# Altium PCB 25X48MM_NFC_ANTENNA_2025-11-10.pcbdoc
Units mm, origin at the board's own origin, x right, y up, seen from the top; angles counter-clockwise.
Board outline 76.21 x 52.06 mm, 2 copper layers (Top Layer, Bottom Layer); 1 components, 0 nets, 2 pads, 0 vias.
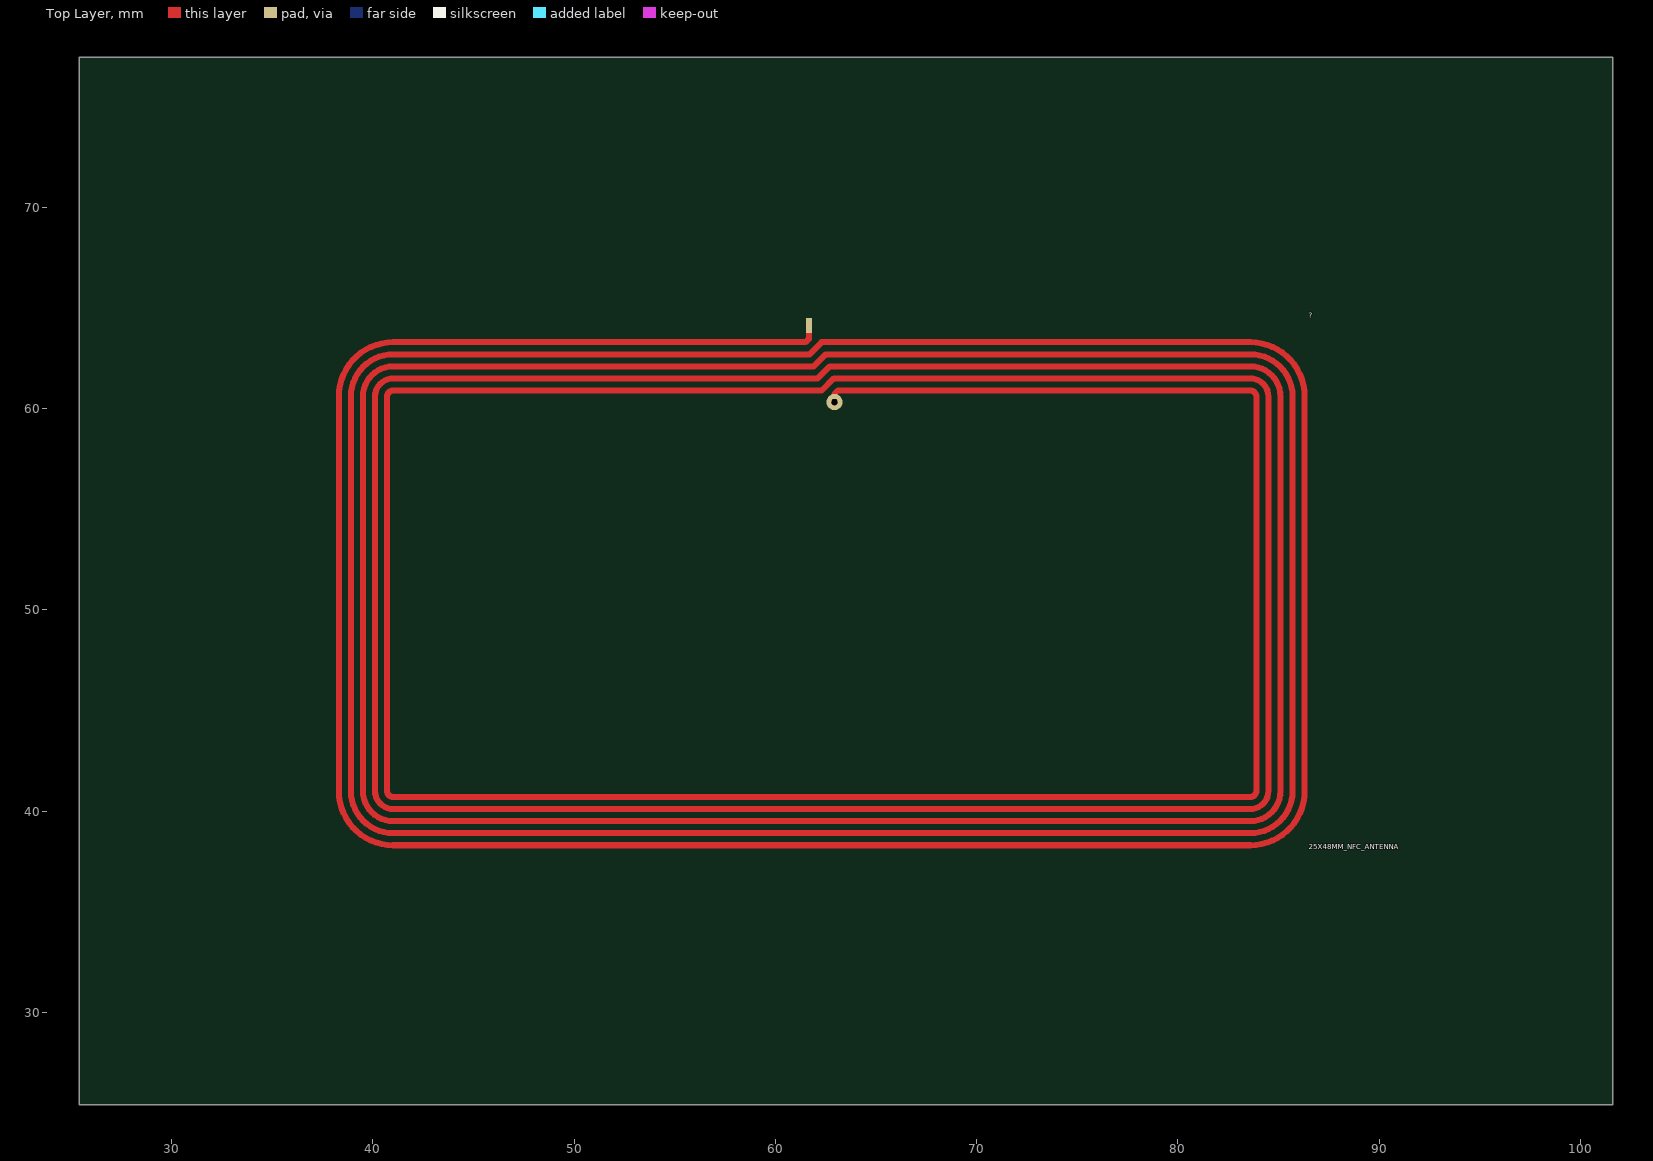
[diagram p0: Top Layer view]
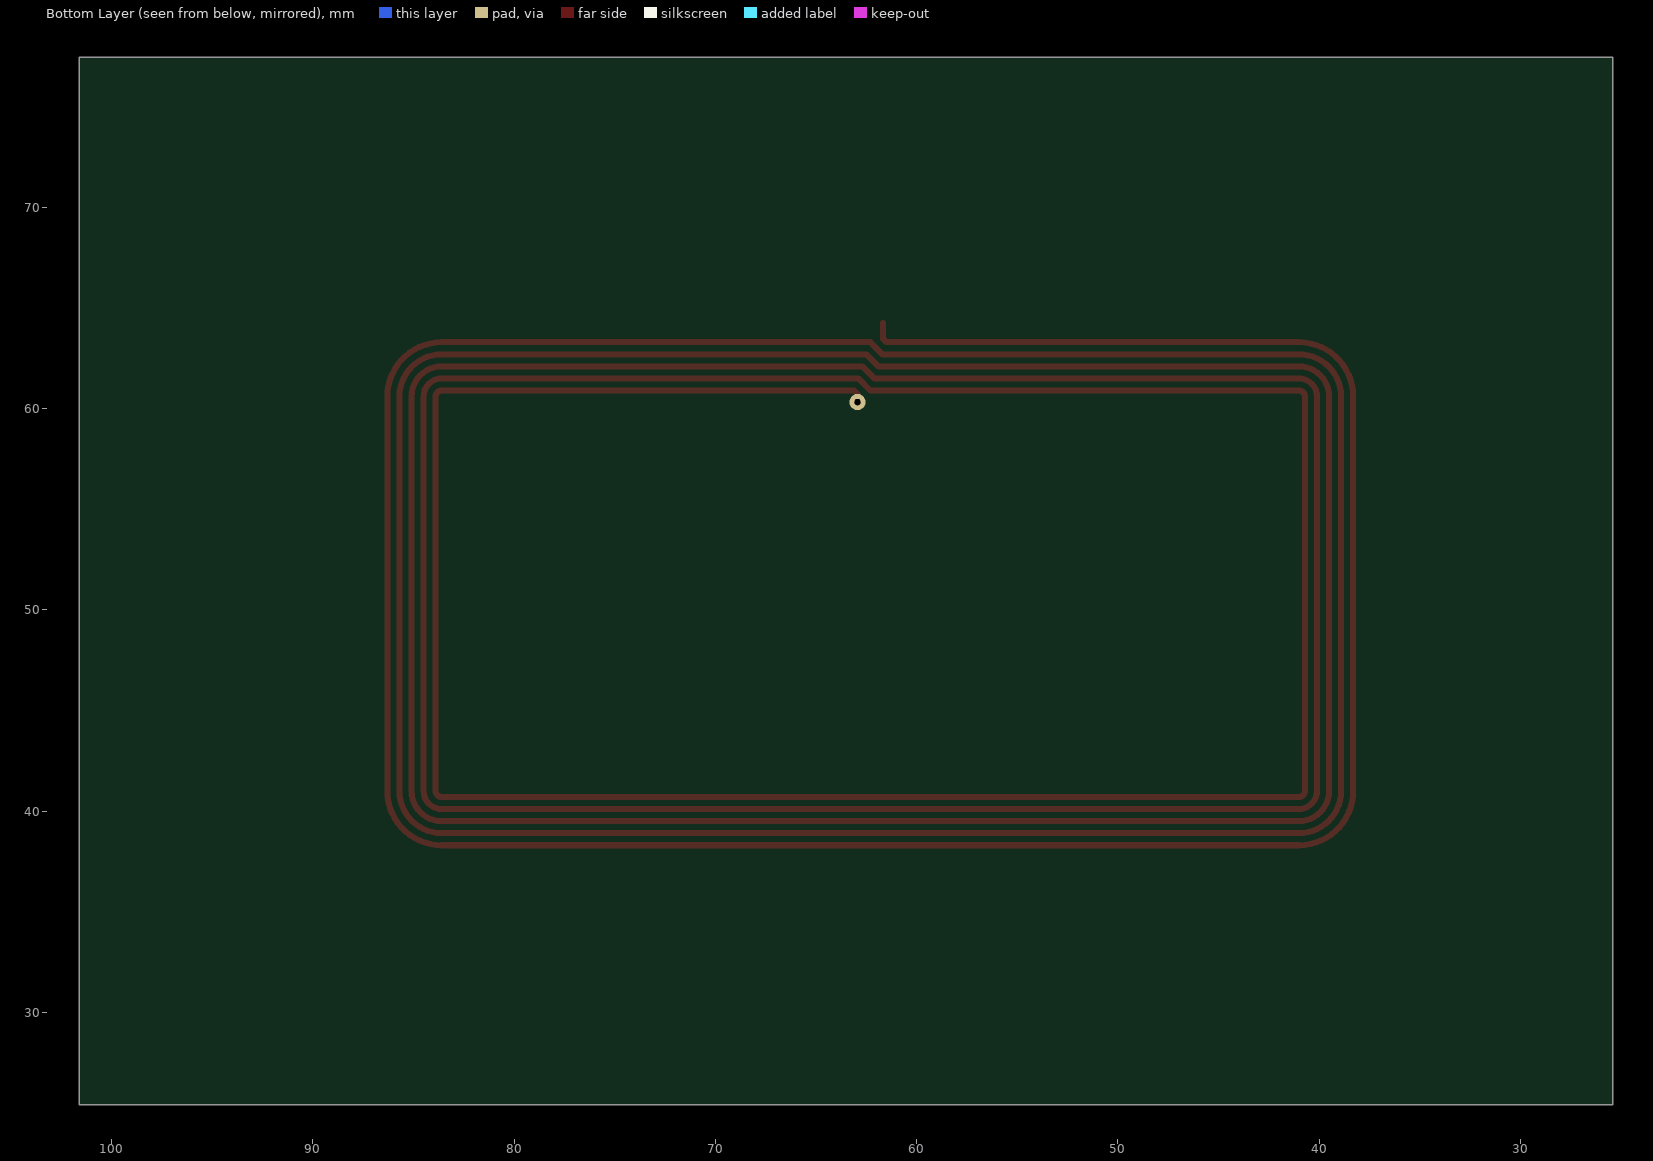
[diagram p1: Bottom Layer view, seen from below]

## Layer stack, top to bottom
Top Layer: signal copper (thickness not stored)
Dielectric: dielectric 0.32, FR-4, Dk 4.8
Bottom Layer: signal copper (thickness not stored)

## Board outline
101.614,25.4 25.4,25.4 25.4,77.465 101.614,77.465

## Components (designator, comment, footprint, x,y, rotation, side; value= is the part's Value field where it differs from the comment)
? "25X48MM_NFC_ANTENNA" 25X48MM_NFC_ANTENNA 62.301,51.305 r0 top

## Footprints (in the part's own frame and the unit in brackets; to place one, negate y for a bottom-side part, rotate by r counter-clockwise, add the part's x,y. Pads: shape width x height; smd on the part's side, far side on the other; paste and mask are expansions set on the pad)
25X48MM_NFC_ANTENNA [mm]
  rect 0.3x0.75 smd paste+0 mask+0.102: P$1(-0.635,12.83)
  round 0.808 hole 0.3 paste+0 mask+0.102: P$2(0.635,9.02)
  Top Layer lines w0.3: -23.4,-10.305 -23.4,9.295 ; -23.4,-10.305 ccw(c-21.3,-10.305) -21.3,-12.405 21.3,-12.405 ccw(c21.3,-10.305) 23.4,-10.305 23.4,9.295 ccw(c21.3,9.295) 21.3,11.395 0.2,11.395 -0.4,10.795 -21.3,10.795 ccw(c-21.3,9.295) -22.8,9.295 -22.8,-10.305 ccw(c-21.3,-10.305) -21.3,-11.805 21.3,-11.805 ccw(c21.3,-10.305) 22.8,-10.305 22.8,9.295 ccw(c21.3,9.295) 21.3,10.795 0.4,10.795 -0.2,10.195 -21.3,10.195 ccw(c-21.3,9.295) -22.2,9.295 ; -23.4,9.295 cw(c-21.3,9.295) -21.3,11.395 -0.6,11.395 0,11.995 21.3,11.995 cw(c21.3,9.295) 24,9.295 24,-10.305 cw(c21.3,-10.305) 21.3,-13.005 -21.3,-13.005 cw(c-21.3,-10.305) -24,-10.305 -24,9.295 cw(c-21.3,9.295) -21.3,11.995 -0.8,11.995 -0.635,12.16 -0.635,12.83 -0.635,12.957 ; -22.2,-10.305 ccw(c-21.3,-10.305) -21.3,-11.205 21.3,-11.205 ccw(c21.3,-10.305) 22.2,-10.305 22.2,9.295 ccw(c21.3,9.295) 21.3,10.195 0.6,10.195 0,9.595 -21.3,9.595 ccw(c-21.3,9.295) -21.6,9.295 -21.6,-10.305 ccw(c-21.3,-10.305) -21.3,-10.605 21.3,-10.605 ccw(c21.3,-10.305) 21.6,-10.305 21.6,9.295 ccw(c21.3,9.295) 21.3,9.595 0.8,9.595 0.635,9.43 0.635,9.02 ; -22.2,-10.305 -22.2,9.295

## Nets (pads, with @x,y where several pads share a name; then routed paths per layer and width w, separated by ;. In a path a pad name is that pad's centre, name@x,y a point inside that pad or via, vN(x,y) a via of type N, cw(c..) or ccw(c..) an arc to the next point about the centre after c; other vN are vias at no path point)
pads on no net: ?.P$1 ?.P$2

## Silkscreen, mask and mechanical layers (free items; w line width, h text height)
Document:
  lines w0.003: 63.507,51.432 63.507,51.433